# EAGLE board untitled (EAGLE 9.5.0)

Size 100 x 80 mm. Coordinates in mm from the lower left corner, seen from the top.
Outline: 0,0 100,0 100,80 0,80 0,0
Copper layers (1*16): Top 0.035mm / dielectric 1.5mm / Bottom 0.035mm
Design rules "default": minimum track width 6mil, minimum drill 0.35mm, track to track 6mil, track to pad 6mil, pad to pad 6mil, via to via 6mil, smd to smd 6mil, copper to edge 40mil, drill to drill 6mil, minimum pad ring 10mil, minimum via ring 8mil, stop-mask expansion 4mil, vias tented up to drill 0mil, thermal gap 10mil

## Footprints (pad centres in the part's own frame; a part is rotated, then mirrored left to right if it is on the bottom)
KK-156-3 = drill 1.7 pad 2.184 long: 1 -3.96,0; 2 0,0; 3 3.96,0
ARDUINO_NANO = drill 0.8 square: 1 -20.32,-7.62 | drill 0.8: 2 -17.78,-7.62; 3 -15.24,-7.62; 4 -12.7,-7.62; 5 -10.16,-7.62; 6 -7.62,-7.62; 7 -5.08,-7.62; 8 -2.54,-7.62; 9 0,-7.62; 10 2.54,-7.62; 11 5.08,-7.62; 12 7.62,-7.62; 13 10.16,-7.62; 14 12.7,-7.62; 15 15.24,-7.62; 16 15.24,7.62; 17 12.7,7.62; 18 10.16,7.62; 19 7.62,7.62; 20 5.08,7.62; 21 2.54,7.62; 22 0,7.62; 23 -2.54,7.62; 24 -5.08,7.62; 25 -7.62,7.62; 26 -10.16,7.62; 27 -12.7,7.62; 28 -15.24,7.62; 29 -17.78,7.62; 30 -20.32,7.62 | hole 1.778: -22.86,-7.62; -22.86,7.62; 17.78,7.62; 17.78,-7.62
JST-XH-04-PACKAGE-LONG-PAD = drill 1.016 long: 1 -3.81,0; 2 -1.27,0; 3 1.27,0; 4 3.81,0
1X02_XTRA_BIG = drill 2.057 pad 3.556: 1 -2.54,0; 2 2.54,0
TO220BV = drill 1.016 long: D 0,-2.54; G -2.54,-2.54; S 2.54,-2.54
AXIAL-0.3 = drill 0.9 pad 1.88: P$1 -3.81,0; P$2 3.81,0
KK-156-4 = drill 1.7 pad 2.184 long: 1 -5.94,0; 2 -1.98,0; 3 1.98,0; 4 5.94,0

## Placement (x,y rotation side)
AM2302  [KK-156-3]  -38.1,24.13 0 top  (outside the outline)
ARDUINO_NANO1  [ARDUINO_NANO]  -33.02,10.16 0 top  (outside the outline)
I2C_AUX  JST-XH-04-PIN-LONG-PAD  [JST-XH-04-PACKAGE-LONG-PAD]  -25.4,41.91 0 top  (outside the outline)
I2C_LCD  JST-XH-04-PIN-LONG-PAD  [JST-XH-04-PACKAGE-LONG-PAD]  -46.99,41.91 0 top  (outside the outline)
J1  [1X02_XTRA_BIG]  -55.88,-3.81 0 top  (outside the outline)
Q1  IRF540  [TO220BV]  -33.02,38.1 0 top  (outside the outline)
Q2  IRF540  [TO220BV]  -44.45,38.1 0 top  (outside the outline)
Q3  IRF540  [TO220BV]  -55.88,38.1 0 top  (outside the outline)
R2  [AXIAL-0.3]  -17.78,49.53 0 top  (outside the outline)
R4  [AXIAL-0.3]  -27.94,49.53 0 top  (outside the outline)
R5  [AXIAL-0.3]  -38.1,49.53 0 top  (outside the outline)
RGB_LED  [KK-156-4]  -21.59,24.13 0 top  (outside the outline)

## Library data of the parts
AM2302 RGB_LED = con-molex; MF: MOLEX; OC_FARNELL: unknown; OC_NEWARK: unknown
ARDUINO_NANO1 = ArduinoNanoV30
I2C_AUX I2C_LCD = Rembrandt Electronics - JST XH Connectors v1-0
J1 = SparkFun-Connectors
Q1-Q3 = transistor-power
R2 R4 R5 = SparkFun-Resistors

## Nets
5V: ARDUINO_NANO1.12
+5V: AM2302.1 I2C_AUX.1 I2C_LCD.1
+12V: ARDUINO_NANO1.15 J1.2 RGB_LED.1
AM2302: AM2302.2 ARDUINO_NANO1.26
B_LED: ARDUINO_NANO1.21 R5.P$2
DOOR_S: ARDUINO_NANO1.22
G_LED: ARDUINO_NANO1.23 R2.P$2
GND: AM2302.3 ARDUINO_NANO1.14 ARDUINO_NANO1.19 I2C_AUX.2 I2C_LCD.2 J1.1 Q1.S Q2.S Q3.S
N$1: Q2.D RGB_LED.3
N$2: Q2.G R4.P$1
N$3: Q3.D RGB_LED.4
N$4: Q3.G R5.P$1
N$11: Q1.G R2.P$1
N$32: Q1.D RGB_LED.2
R_LED: ARDUINO_NANO1.24 R4.P$2
SCL: ARDUINO_NANO1.9 I2C_AUX.4 I2C_LCD.4
SDA: ARDUINO_NANO1.8 I2C_AUX.3 I2C_LCD.3
VENT: ARDUINO_NANO1.28

## Tracks (layer width: path | path; a pad name or v marks a point on that pad's centre or on a via)
+5V  (2 unrouted)
+12V  (2 unrouted)
AM2302  (1 unrouted)
B_LED  (1 unrouted)
G_LED  (1 unrouted)
GND  (8 unrouted)
N$1  (1 unrouted)
N$2  (1 unrouted)
N$3  (1 unrouted)
N$4  (1 unrouted)
N$11  (1 unrouted)
N$32  (1 unrouted)
R_LED  (1 unrouted)
SCL  (2 unrouted)
SDA  (2 unrouted)